# Altium PCB 电子脚铐手持式主控板V3.PcbDoc (part 2 of 3)
Units mm, origin at the board's own origin, x right, y up, seen from the top; angles counter-clockwise.
Board outline 100 x 95 mm, 2 copper layers (Top Layer, Bottom Layer); 124 components, 70 nets, 370 pads, 89 vias.
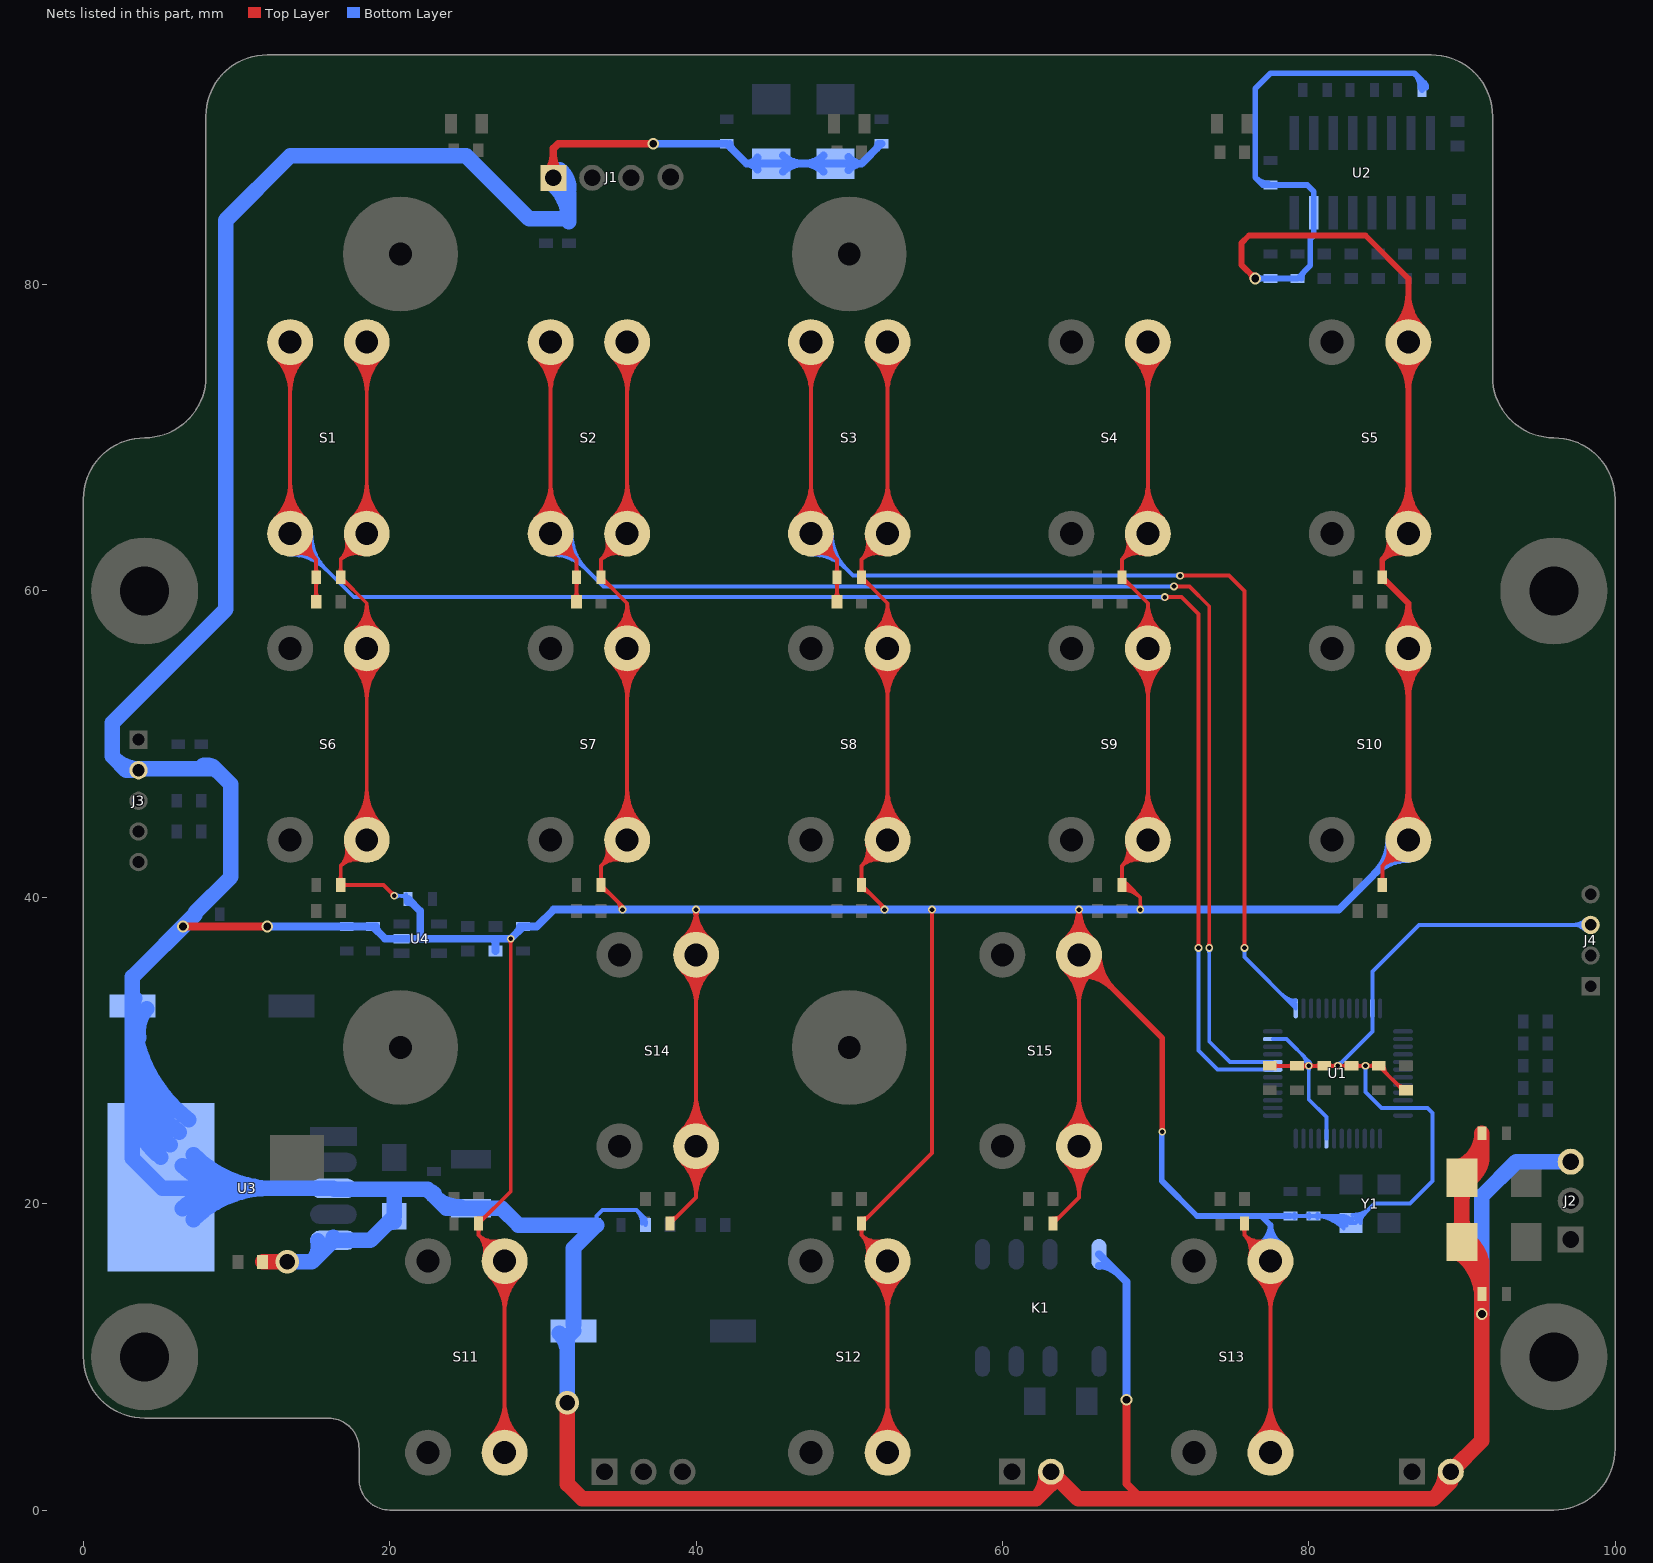
[diagram p2: the nets of this part, all layers, seen from the top]

## Via types
v1: diameter 0.508, hole 0.305, Top Layer to Bottom Layer, tented both sides, 75 vias
v2: diameter 0.762, hole 0.508, Top Layer to Bottom Layer, tented both sides, 9 vias
v3: diameter 1.524, hole 1.016, Top Layer to Bottom Layer, tented both sides, 5 vias

## Nets (pads, with @x,y where several pads share a name; then routed paths per layer and width w, separated by ;. In a path a pad name is that pad's centre, name@x,y a point inside that pad or via, vN(x,y) a via of type N, cw(c..) or ccw(c..) an arc to the next point about the centre after c; other vN are vias at no path point) (continued)
GND: C1.2 C2.2 C3.2 C4.2 C5.2 C6.2 C7.2 C8.1 C9.1 C10.2 C11.2 C12.2 C13.2 C14.2 C15.2 C16.2 C17.2 C18.2 C19.2 C20.2 C21.2 C23.1 C25.1 C26.1 C27.2 C28.2 C29.1 C30.2 C31.2 C32.2 C33.2 C34.2 C35.2 C36.2 C37.2 C38.2 C39.2 C40.2 C41.2 C42.2 C43.2 C44.2 C45.2 C46.2 D5.1 D6.1 D7.1 D8.2 D9.2 J1.1 J2.3 J3.2 J4.3 J6.2 J7.2 K1.8 R4.2 R10.2 R13.2 R15.1 S1.1 S2.1 S3.1 S4.1 S5.1 S6.1 S7.1 S8.1 S9.1 S10.1 S11.1 S12.1 S13.1 S14.1 S15.1 U1.8 U1.23 U1.35 U1.47 U2.15 U3.0 U3.3 U3.5 U4.2 Y1.2 | length 1603.9
  Top Layer w0.254: C35.2@16.678,41.072 ccw(c16.382,41.368) 16.8,41.368 ccw(c17.218,41.368) C35.2@16.922,41.072 ; C30.2@16.678,61.172 ccw(c16.382,61.468) 16.8,61.468 ccw(c17.218,61.468) C30.2@16.922,61.172 ; C30.2@16.8,60.577 cw(c16.8,59.797) 17.351,60.349 ; C35.2@16.922,40.678 cw(c17.218,40.382) 17.218,40.8 cw(c17.218,41.218) C35.2@16.922,40.922 ; S6.1@17.171,43.407 cw(c15.797,43.053) 16.8,42.05 ; S1.1@17.171,63.407 cw(c15.797,63.053) 16.8,62.05 ; S6.1@17.417,43.47 cw(c16.297,43.182) 17.115,42.364 cw(c17.932,41.547) S6.1@18.221,42.666 ; S1.1@17.417,63.47 cw(c16.297,63.182) 17.115,62.364 cw(c17.932,61.547) S1.1@18.221,62.666 ; S6.1@17.529,44.721 ccw(c15.185,47.065) 18.5,47.065 ccw(c21.815,47.065) S6.1@19.471,44.721 ; S6.1@17.529,55.279 cw(c15.185,52.935) 18.5,52.935 cw(c21.815,52.935) S6.1@19.471,55.279 ; S1.1@17.529,64.721 ccw(c15.185,67.065) 18.5,67.065 ccw(c21.815,67.065) S1.1@19.471,64.721 ; S1.1@17.529,75.279 cw(c15.185,72.935) 18.5,72.935 cw(c21.815,72.935) S1.1@19.471,75.279 ; S6.1@17.616,57.3 ccw(c16.018,59.2) 18.5,59.2 ; S6.1@17.663,43.534 cw(c16.797,43.311) 17.429,42.679 cw(c18.061,42.047) S6.1@18.284,42.912 ; S1.1@17.663,63.534 cw(c16.797,63.311) 17.429,62.679 cw(c18.061,62.047) S1.1@18.284,62.912 ; S6.1@17.709,44.541 ccw(c15.799,46.451) 18.5,46.451 ccw(c21.202,46.451) S6.1@19.291,44.541 ; S6.1@17.709,55.459 cw(c15.799,53.548) 18.5,53.548 cw(c21.202,53.548) S6.1@19.291,55.459 ; S1.1@17.709,64.541 ccw(c15.799,66.451) 18.5,66.451 ccw(c21.202,66.451) S1.1@19.291,64.541 ; S1.1@17.709,75.459 cw(c15.799,73.548) 18.5,73.548 cw(c21.202,73.548) S1.1@19.291,75.459 ; S6.1@17.78,57.106 ccw(c16.477,58.654) 18.5,58.654 ccw(c20.523,58.654) S6.1@19.221,57.106 ; S6.1@17.889,44.361 ccw(c16.412,45.838) 18.5,45.838 ccw(c20.588,45.838) S6.1@19.112,44.361 ; S6.1@17.889,55.638 cw(c16.412,54.162) 18.5,54.162 cw(c20.588,54.162) S6.1@19.112,55.638 ; S1.1@17.889,64.361 ccw(c16.412,65.838) 18.5,65.838 ccw(c20.588,65.838) S1.1@19.112,64.361 ; S1.1@17.889,75.638 cw(c16.412,74.162) 18.5,74.162 cw(c20.588,74.162) S1.1@19.112,75.638 ; S6.1@17.943,56.912 ccw(c16.936,58.108) 18.5,58.108 ccw(c20.064,58.108) S6.1@19.057,56.912 ; S6.1@18.157,42.42 ccw(c17.803,41.047) 16.8,42.05 ; S1.1@18.157,62.42 ccw(c17.803,61.047) 16.8,62.05 ; S1.1@18.5,76.25 S1.1@18.5,63.75 16.8,62.05 ; S6.1@19.384,57.3 cw(c20.983,59.2) 18.5,59.2 ; v1@20.173,40.1 ccw(c19.866,40.1) 20.083,40.317 ccw(c20.3,40.534) v1@20.3,40.227 ; v1(20.3,40.1) 19.6,40.8 C35.2@16.8,40.8 16.8,42.05 ; C40.2@25.678,18.428 cw(c25.382,18.132) 25.8,18.132 cw(c26.218,18.132) C40.2@25.922,18.428 ; C40.2@25.8,19.023 ccw(c25.8,19.803) 26.351,19.251 ; S11.1@26.171,16.593 ccw(c24.797,16.947) 25.8,17.95 ; S11.1@26.417,16.529 ccw(c25.297,16.818) 26.115,17.635 ccw(c26.932,18.453) S11.1@27.221,17.333 ; S11.1@26.529,4.721 ccw(c24.185,7.065) 27.5,7.065 ccw(c30.815,7.065) S11.1@28.471,4.721 ; S11.1@26.529,15.279 cw(c24.185,12.935) 27.5,12.935 cw(c30.815,12.935) S11.1@28.471,15.279 ; S11.1@26.663,16.466 ccw(c25.797,16.689) 26.429,17.321 ccw(c27.061,17.953) S11.1@27.284,17.087 ; S11.1@26.709,4.541 ccw(c24.799,6.451) 27.5,6.451 ccw(c30.202,6.451) S11.1@28.291,4.541 ; S11.1@26.709,15.459 cw(c24.799,13.548) 27.5,13.548 cw(c30.202,13.548) S11.1@28.291,15.459 ; S11.1@26.889,4.361 ccw(c25.412,5.838) 27.5,5.838 ccw(c29.589,5.838) S11.1@28.112,4.361 ; S11.1@26.889,15.638 cw(c25.412,14.161) 27.5,14.161 cw(c29.589,14.161) S11.1@28.112,15.638 ; S11.1@27.157,17.579 cw(c26.803,18.953) 25.8,17.95 ; S11.1@27.5,3.75 S11.1@27.5,16.25 25.8,17.95 ; v1@27.81,37.21 cw(c27.593,36.993) 27.9,36.993 cw(c28.207,36.993) v1@27.99,37.21 ; v1(27.9,37.3) 27.9,20.8 C40.2@25.8,18.7 25.8,17.95 ; C36.2@33.678,41.072 ccw(c33.382,41.368) 33.8,41.368 ccw(c34.218,41.368) C36.2@33.922,41.072 ; C31.2@33.678,61.172 ccw(c33.382,61.468) 33.8,61.468 ccw(c34.218,61.468) C31.2@33.922,61.172 ; C36.2@33.8,40.477 cw(c33.8,39.697) 34.351,40.249 ; C31.2@33.8,60.577 cw(c33.8,59.797) 34.351,60.349 ; S7.1@34.171,43.407 cw(c32.797,43.053) 33.8,42.05 ; S2.1@34.171,63.407 cw(c32.797,63.053) 33.8,62.05 ; S7.1@34.417,43.47 cw(c33.297,43.182) 34.115,42.364 cw(c34.932,41.547) S7.1@35.221,42.666 ; S2.1@34.417,63.47 cw(c33.297,63.182) 34.115,62.364 cw(c34.932,61.547) S2.1@35.221,62.666 ; S7.1@34.529,44.721 ccw(c32.185,47.065) 35.5,47.065 ccw(c38.815,47.065) S7.1@36.471,44.721 ; S7.1@34.529,55.279 cw(c32.185,52.935) 35.5,52.935 cw(c38.815,52.935) S7.1@36.471,55.279 ; S2.1@34.529,64.721 ccw(c32.185,67.065) 35.5,67.065 ccw(c38.815,67.065) S2.1@36.471,64.721 ; S2.1@34.529,75.279 cw(c32.185,72.935) 35.5,72.935 cw(c38.815,72.935) S2.1@36.471,75.279 ; S7.1@34.616,57.3 ccw(c33.018,59.2) 35.5,59.2 ; S7.1@34.663,43.534 cw(c33.797,43.311) 34.429,42.679 cw(c35.061,42.047) S7.1@35.284,42.912 ; S2.1@34.663,63.534 cw(c33.797,63.311) 34.429,62.679 cw(c35.061,62.047) S2.1@35.284,62.912 ; S7.1@34.709,44.541 ccw(c32.799,46.451) 35.5,46.451 ccw(c38.202,46.451) S7.1@36.291,44.541 ; S7.1@34.709,55.459 cw(c32.799,53.548) 35.5,53.548 cw(c38.202,53.548) S7.1@36.291,55.459 ; S2.1@34.709,64.541 ccw(c32.799,66.451) 35.5,66.451 ccw(c38.202,66.451) S2.1@36.291,64.541 ; S2.1@34.709,75.459 cw(c32.799,73.548) 35.5,73.548 cw(c38.202,73.548) S2.1@36.291,75.459 ; S7.1@34.78,57.106 ccw(c33.477,58.654) 35.5,58.654 ccw(c37.523,58.654) S7.1@36.221,57.106 ; 34.842,39.758 cw(c34.284,39.2) v1@35.073,39.2 ; S7.1@34.889,44.361 ccw(c33.412,45.838) 35.5,45.838 ccw(c37.589,45.838) S7.1@36.112,44.361 ; S7.1@34.889,55.638 cw(c33.412,54.162) 35.5,54.162 cw(c37.589,54.162) S7.1@36.112,55.638 ; S2.1@34.889,64.361 ccw(c33.412,65.838) 35.5,65.838 ccw(c37.589,65.838) S2.1@36.112,64.361 ; S2.1@34.889,75.638 cw(c33.412,74.162) 35.5,74.162 cw(c37.589,74.162) S2.1@36.112,75.638 ; S7.1@34.943,56.912 ccw(c33.936,58.108) 35.5,58.108 ccw(c37.064,58.108) S7.1@36.057,56.912 ; S7.1@35.157,42.42 ccw(c34.803,41.047) 33.8,42.05 ; S2.1@35.157,62.42 ccw(c34.803,61.047) 33.8,62.05 ; v1(35.2,39.2) 35.2,39.4 C36.2@33.8,40.8 33.8,42.05 ; S2.1@35.5,76.25 S2.1@35.5,63.75 33.8,62.05 ; S7.1@36.384,57.3 cw(c37.983,59.2) 35.5,59.2 ; C43.2@38.3,18.7 40,20.4 S14.1@40,23.75 S14.1@40,36.25 v1(40,39.2) ; C43.2@38.3,19.023 ccw(c38.3,19.803) 38.851,19.251 ; S14.1@39.029,22.779 cw(c36.686,20.435) 40,20.435 cw(c43.315,20.435) S14.1@40.971,22.779 ; S14.1@39.029,24.721 ccw(c36.686,27.065) 40,27.065 ccw(c43.315,27.065) S14.1@40.971,24.721 ; S14.1@39.029,35.279 cw(c36.686,32.935) 40,32.935 cw(c43.315,32.935) S14.1@40.971,35.279 ; S14.1@39.116,37.3 ccw(c37.518,39.2) v1(40,39.2) ; S14.1@39.209,22.959 cw(c37.299,21.048) 40,21.048 cw(c42.702,21.048) S14.1@40.791,22.959 ; S14.1@39.209,24.541 ccw(c37.299,26.451) 40,26.451 ccw(c42.702,26.451) S14.1@40.791,24.541 ; S14.1@39.209,35.459 cw(c37.299,33.548) 40,33.548 cw(c42.702,33.548) S14.1@40.791,35.459 ; S14.1@39.28,37.106 ccw(c37.977,38.654) 40,38.654 ccw(c42.023,38.654) S14.1@40.721,37.106 ; S14.1@39.389,23.138 cw(c37.912,21.662) 40,21.662 cw(c42.089,21.662) S14.1@40.612,23.138 ; S14.1@39.389,24.361 ccw(c37.912,25.838) 40,25.838 ccw(c42.089,25.838) S14.1@40.612,24.361 ; S14.1@39.389,35.638 cw(c37.912,34.162) 40,34.162 cw(c42.089,34.162) S14.1@40.612,35.638 ; S14.1@39.443,36.912 ccw(c38.436,38.108) 40,38.108 ccw(c41.564,38.108) S14.1@40.557,36.912 ; v1@39.894,39.13 cw(c39.636,38.962) 39.937,38.899 ; v1@39.91,39.11 cw(c39.693,38.893) 40,38.893 ; v1@39.93,39.094 cw(c39.762,38.837) 40.063,38.9 ; 39.938,38.9 cw(c40.237,38.838) v1@40.07,39.094 ; 40,38.894 cw(c40.306,38.894) v1@40.09,39.11 ; 40.063,38.9 cw(c40.362,38.963) v1@40.106,39.13 ; S14.1@40.884,37.3 cw(c42.483,39.2) v1(40,39.2) ; C41.2@50.678,18.428 cw(c50.382,18.132) 50.8,18.132 cw(c51.218,18.132) C41.2@50.922,18.428 ; C37.2@50.678,41.072 ccw(c50.382,41.368) 50.8,41.368 ccw(c51.218,41.368) C37.2@50.922,41.072 ; C32.2@50.678,61.172 ccw(c50.382,61.468) 50.8,61.468 ccw(c51.218,61.468) C32.2@50.922,61.172 ; C41.2@50.8,19.023 ccw(c50.8,19.803) 51.351,19.251 ; C37.2@50.8,40.477 cw(c50.8,39.697) 51.351,40.249 ; C32.2@50.8,60.577 cw(c50.8,59.797) 51.351,60.349 ; S12.1@51.171,16.593 ccw(c49.797,16.947) 50.8,17.95 ; S8.1@51.171,43.407 cw(c49.797,43.053) 50.8,42.05 ; S3.1@51.171,63.407 cw(c49.797,63.053) 50.8,62.05 ; S12.1@51.417,16.529 ccw(c50.297,16.818) 51.115,17.635 ccw(c51.932,18.453) S12.1@52.221,17.333 ; S8.1@51.417,43.47 cw(c50.297,43.182) 51.115,42.364 cw(c51.932,41.547) S8.1@52.221,42.666 ; S3.1@51.417,63.47 cw(c50.297,63.182) 51.115,62.364 cw(c51.932,61.547) S3.1@52.221,62.666 ; S12.1@51.529,4.721 ccw(c49.186,7.065) 52.5,7.065 ccw(c55.815,7.065) S12.1@53.471,4.721 ; S12.1@51.529,15.279 cw(c49.186,12.935) 52.5,12.935 cw(c55.815,12.935) S12.1@53.471,15.279 ; S8.1@51.529,44.721 ccw(c49.186,47.065) 52.5,47.065 ccw(c55.815,47.065) S8.1@53.471,44.721 ; S8.1@51.529,55.279 cw(c49.186,52.935) 52.5,52.935 cw(c55.815,52.935) S8.1@53.471,55.279 ; S3.1@51.529,64.721 ccw(c49.186,67.065) 52.5,67.065 ccw(c55.815,67.065) S3.1@53.471,64.721 ; S3.1@51.529,75.279 cw(c49.186,72.935) 52.5,72.935 cw(c55.815,72.935) S3.1@53.471,75.279 ; S8.1@51.616,57.3 ccw(c50.018,59.2) 52.5,59.2 ; S12.1@51.663,16.466 ccw(c50.797,16.689) 51.429,17.321 ccw(c52.061,17.953) S12.1@52.284,17.087 ; S8.1@51.663,43.534 cw(c50.797,43.311) 51.429,42.679 cw(c52.061,42.047) S8.1@52.284,42.912 ; S3.1@51.663,63.534 cw(c50.797,63.311) 51.429,62.679 cw(c52.061,62.047) S3.1@52.284,62.912 ; S12.1@51.709,4.541 ccw(c49.799,6.451) 52.5,6.451 ccw(c55.202,6.451) S12.1@53.291,4.541 ; S12.1@51.709,15.459 cw(c49.799,13.548) 52.5,13.548 cw(c55.202,13.548) S12.1@53.291,15.459 ; S8.1@51.709,44.541 ccw(c49.799,46.451) 52.5,46.451 ccw(c55.202,46.451) S8.1@53.291,44.541 ; S8.1@51.709,55.459 cw(c49.799,53.548) 52.5,53.548 cw(c55.202,53.548) S8.1@53.291,55.459 ; S3.1@51.709,64.541 ccw(c49.799,66.451) 52.5,66.451 ccw(c55.202,66.451) S3.1@53.291,64.541 ; S3.1@51.709,75.459 cw(c49.799,73.548) 52.5,73.548 cw(c55.202,73.548) S3.1@53.291,75.459 ; S8.1@51.78,57.106 ccw(c50.477,58.654) 52.5,58.654 ccw(c54.523,58.654) S8.1@53.221,57.106 ; S12.1@51.889,4.361 ccw(c50.412,5.838) 52.5,5.838 ccw(c54.589,5.838) S12.1@53.112,4.361 ; S12.1@51.889,15.638 cw(c50.412,14.161) 52.5,14.161 cw(c54.589,14.161) S12.1@53.112,15.638 ; S8.1@51.889,44.361 ccw(c50.412,45.838) 52.5,45.838 ccw(c54.589,45.838) S8.1@53.112,44.361 ; S8.1@51.889,55.638 cw(c50.412,54.162) 52.5,54.162 cw(c54.589,54.162) S8.1@53.112,55.638 ; S3.1@51.889,64.361 ccw(c50.412,65.838) 52.5,65.838 ccw(c54.589,65.838) S3.1@53.112,64.361 ; S3.1@51.889,75.638 cw(c50.412,74.162) 52.5,74.162 cw(c54.589,74.162) S3.1@53.112,75.638 ; S8.1@51.943,56.912 ccw(c50.936,58.108) 52.5,58.108 ccw(c54.064,58.108) S8.1@53.057,56.912 ; 52.012,39.588 cw(c51.625,39.2) v1@52.173,39.2 ; S12.1@52.157,17.579 cw(c51.803,18.953) 50.8,17.95 ; S8.1@52.157,42.42 ccw(c51.803,41.046) 50.8,42.05 ; S3.1@52.157,62.42 ccw(c51.803,61.046) 50.8,62.05 ; v1(52.3,39.2) 52.3,39.3 C37.2@50.8,40.8 50.8,42.05 ; S12.1@52.5,3.75 S12.1@52.5,16.25 50.8,17.95 ; S3.1@52.5,76.25 S3.1@52.5,63.75 50.8,62.05 ; S8.1@53.384,57.3 cw(c54.983,59.2) 52.5,59.2 ; v1@55.31,39.11 cw(c55.093,38.893) 55.4,38.893 cw(c55.707,38.893) v1@55.49,39.11 ; v1(55.4,39.2) 55.4,23.3 C41.2@50.8,18.7 50.8,17.95 ; C44.2@63.3,18.7 65,20.4 S15.1@65,23.75 S15.1@65,36.25 ; C44.2@63.3,19.023 ccw(c63.3,19.803) 63.851,19.251 ; S15.1@64.029,22.779 cw(c61.686,20.435) 65,20.435 cw(c68.315,20.435) S15.1@65.971,22.779 ; S15.1@64.029,24.721 ccw(c61.686,27.065) 65,27.065 ccw(c68.315,27.065) S15.1@65.971,24.721 ; S15.1@64.029,35.279 cw(c61.686,32.935) 65,32.935 cw(c68.315,32.935) S15.1@65.971,35.279 ; S15.1@64.209,22.959 cw(c62.299,21.048) 65,21.048 cw(c67.702,21.048) S15.1@65.791,22.959 ; S15.1@64.209,24.541 ccw(c62.299,26.451) 65,26.451 ccw(c67.702,26.451) S15.1@65.791,24.541 ; S15.1@64.209,35.459 cw(c62.299,33.548) 65,33.548 cw(c67.702,33.548) S15.1@65.791,35.459 ; S15.1@64.389,23.138 cw(c62.912,21.662) 65,21.662 cw(c67.089,21.662) S15.1@65.612,23.138 ; S15.1@64.389,24.361 ccw(c62.912,25.838) 65,25.838 ccw(c67.089,25.838) S15.1@65.612,24.361 ; S15.1@64.389,35.638 cw(c62.912,34.162) 65,34.162 cw(c67.089,34.162) S15.1@65.612,35.638 ; C38.2@67.678,41.072 ccw(c67.382,41.368) 67.8,41.368 ccw(c68.218,41.368) C38.2@67.922,41.072 ; C33.2@67.678,61.172 ccw(c67.382,61.468) 67.8,61.468 ccw(c68.218,61.468) C33.2@67.922,61.172 ; C38.2@67.791,40.985 cw(c67.805,40.477) 68.164,40.836 ; C38.2@67.798,40.731 cw(c67.826,39.662) 68.582,40.418 ; C33.2@67.8,60.577 cw(c67.8,59.797) 68.351,60.349 ; C38.2@67.805,40.477 cw(c67.847,38.847) 69,40 ; C38.2@67.926,40.682 cw(c68.2,40.424) 68.2,40.8 ; C38.2@67.926,40.918 ccw(c68.2,41.176) 68.2,40.8 ; S9.1@68.171,43.407 cw(c66.797,43.053) 67.8,42.05 ; S4.1@68.171,63.407 cw(c66.797,63.053) 67.8,62.05 ; S9.1@68.417,43.47 cw(c67.297,43.182) 68.115,42.364 cw(c68.932,41.547) S9.1@69.221,42.666 ; S4.1@68.417,63.47 cw(c67.297,63.182) 68.115,62.364 cw(c68.932,61.547) S4.1@69.221,62.666 ; S9.1@68.529,44.721 ccw(c66.186,47.065) 69.5,47.065 ccw(c72.815,47.065) S9.1@70.471,44.721 ; S9.1@68.529,55.279 cw(c66.186,52.935) 69.5,52.935 cw(c72.815,52.935) S9.1@70.471,55.279 ; S4.1@68.529,64.721 ccw(c66.186,67.065) 69.5,67.065 ccw(c72.815,67.065) S4.1@70.471,64.721 ; S4.1@68.529,75.279 cw(c66.186,72.935) 69.5,72.935 cw(c72.815,72.935) S4.1@70.471,75.279 ; S9.1@68.616,57.3 ccw(c67.018,59.2) 69.5,59.2 ; S9.1@68.663,43.534 cw(c67.797,43.311) 68.429,42.679 cw(c69.061,42.047) S9.1@69.284,42.912 ; S4.1@68.663,63.534 cw(c67.797,63.311) 68.429,62.679 cw(c69.061,62.047) S4.1@69.284,62.912 ; S9.1@68.709,44.541 ccw(c66.799,46.451) 69.5,46.451 ccw(c72.202,46.451) S9.1@70.291,44.541 ; S9.1@68.709,55.459 cw(c66.799,53.548) 69.5,53.548 cw(c72.202,53.548) S9.1@70.291,55.459 ; S4.1@68.709,64.541 ccw(c66.799,66.451) 69.5,66.451 ccw(c72.202,66.451) S4.1@70.291,64.541 ; S4.1@68.709,75.459 cw(c66.799,73.548) 69.5,73.548 cw(c72.202,73.548) S4.1@70.291,75.459 ; S9.1@68.78,57.106 ccw(c67.477,58.654) 69.5,58.654 ccw(c71.523,58.654) S9.1@70.221,57.106 ; S9.1@68.889,44.361 ccw(c67.412,45.838) 69.5,45.838 ccw(c71.589,45.838) S9.1@70.112,44.361 ; S9.1@68.889,55.638 cw(c67.412,54.162) 69.5,54.162 cw(c71.589,54.162) S9.1@70.112,55.638 ; S4.1@68.889,64.361 ccw(c67.412,65.838) 69.5,65.838 ccw(c71.589,65.838) S4.1@70.112,64.361 ; S4.1@68.889,75.638 cw(c67.412,74.162) 69.5,74.162 cw(c71.589,74.162) S4.1@70.112,75.638 ; v1@68.91,39.29 ccw(c68.693,39.507) 69,39.507 ccw(c69.307,39.507) v1@69.09,39.29 ; S9.1@68.943,56.912 ccw(c67.936,58.108) 69.5,58.108 ccw(c71.064,58.108) S9.1@70.057,56.912 ; v1(69,39.2) 69,40 ; S9.1@69.157,42.42 ccw(c68.803,41.046) 67.8,42.05 ; S4.1@69.157,62.42 ccw(c68.803,61.046) 67.8,62.05 ; S4.1@69.5,76.25 S4.1@69.5,63.75 67.8,62.05 ; S9.1@70.384,57.3 cw(c71.982,59.2) 69.5,59.2 ; C42.2@75.678,18.428 cw(c75.382,18.132) 75.8,18.132 cw(c76.218,18.132) C42.2@75.922,18.428 ; C42.2@75.8,18.7 75.8,17.95 ; S13.1@76.171,16.593 ccw(c74.797,16.947) 75.8,17.95 ; S13.1@76.417,16.529 ccw(c75.297,16.818) 76.115,17.635 ccw(c76.932,18.453) S13.1@77.221,17.333 ; S13.1@76.529,4.721 ccw(c74.186,7.065) 77.5,7.065 ccw(c80.815,7.065) S13.1@78.471,4.721 ; S13.1@76.529,15.279 cw(c74.186,12.935) 77.5,12.935 cw(c80.815,12.935) S13.1@78.471,15.279 ; S13.1@76.663,16.466 ccw(c75.797,16.689) 76.429,17.321 ccw(c77.061,17.953) S13.1@77.284,17.087 ; S13.1@76.709,4.541 ccw(c74.799,6.451) 77.5,6.451 ccw(c80.202,6.451) S13.1@78.291,4.541 ; S13.1@76.709,15.459 cw(c74.799,13.548) 77.5,13.548 cw(c80.202,13.548) S13.1@78.291,15.459 ; S13.1@76.889,4.361 ccw(c75.412,5.838) 77.5,5.838 ccw(c79.589,5.838) S13.1@78.112,4.361 ; S13.1@76.889,15.638 cw(c75.412,14.161) 77.5,14.161 cw(c79.589,14.161) S13.1@78.112,15.638 ; S13.1@77.157,17.579 cw(c76.803,18.953) 75.8,17.95 ; C6.2@77.45,29 C5.2@79.23,29 v1(80,29) C4.2@81.01,29 v1(81.9,29) C46.2@82.79,29 v1(83.7,29) C7.2@84.57,29 86.27,27.3 R4.2@86.3,27.3 ; S13.1@77.5,3.75 S13.1@77.5,16.25 75.8,17.95 ; C6.2@77.722,28.878 cw(c78.018,28.582) 78.018,29 cw(c78.018,29.418) C6.2@77.722,29.122 ; C5.2@78.958,28.878 ccw(c78.662,28.582) 78.662,29 ccw(c78.662,29.418) C5.2@78.958,29.122 ; C5.2@79.502,28.878 cw(c79.798,28.582) 79.798,29 cw(c79.798,29.418) C5.2@79.502,29.122 ; C5.2@79.676,28.968 cw(c79.741,28.726) v1@79.913,28.908 ; C5.2@79.676,29.032 ccw(c79.741,29.274) v1@79.913,29.092 ; v1@79.91,28.91 ccw(c79.693,28.693) 79.693,29 ccw(c79.693,29.307) v1@79.91,29.09 ; v1@80.09,28.91 cw(c80.307,28.693) 80.307,29 cw(c80.307,29.307) v1@80.09,29.09 ; C4.2@80.738,28.878 ccw(c80.442,28.582) 80.442,29 ccw(c80.442,29.418) C4.2@80.738,29.122 ; C4.2@81.282,28.878 cw(c81.578,28.582) 81.578,29 cw(c81.578,29.418) C4.2@81.282,29.122 ; v1@81.81,28.91 ccw(c81.593,28.693) 81.593,29 ccw(c81.593,29.307) v1@81.81,29.09 ; v1@81.99,28.91 cw(c82.207,28.693) 82.207,29 cw(c82.207,29.307) v1@81.99,29.09 ; C46.2@82.518,28.878 ccw(c82.222,28.582) 82.222,29 ccw(c82.222,29.418) C46.2@82.518,29.122 ; C46.2@83.062,28.878 cw(c83.358,28.582) 83.358,29 cw(c83.358,29.418) C46.2@83.062,29.122 ; v1@83.61,28.91 ccw(c83.393,28.693) 83.393,29 ccw(c83.393,29.307) v1@83.61,29.09 ; v1@83.79,28.91 cw(c84.007,28.693) 84.007,29 cw(c84.007,29.307) v1@83.79,29.09 ; C7.2@84.298,28.878 ccw(c84.002,28.582) 84.002,29 ccw(c84.002,29.418) C7.2@84.298,29.122 ; C39.2@84.678,41.072 ccw(c84.382,41.368) 84.8,41.368 ccw(c85.218,41.368) C39.2@84.922,41.072 ; C39.2@84.8,40.8 84.8,42.05 ; C7.2@84.893,29 ccw(c85.673,29) 85.121,28.449 ; S10.1@85.171,43.407 cw(c83.797,43.053) 84.8,42.05 ; S10.1@85.417,43.47 cw(c84.297,43.182) 85.115,42.364 cw(c85.932,41.547) S10.1@86.221,42.666 ; S10.1@85.663,43.534 cw(c84.797,43.311) 85.429,42.679 cw(c86.061,42.047) S10.1@86.284,42.912 ; 85.733,27.837 ccw(c86.25,28.354) R4.2@86.25,27.623 ; R4.2@85.926,27.644 cw(c85.682,27.4) R4.2@86.027,27.4 ; S10.1@86.157,42.42 ccw(c85.803,41.046) 84.8,42.05 ; S10.1@86.5,43.75 84.8,42.05 ; 16.8,42.05 S6.1@18.5,43.75 S6.1@18.5,56.25 18.5,59.2 ; 16.8,62.05 C30.2@16.8,60.9 18.5,59.2 ; 33.8,42.05 S7.1@35.5,43.75 S7.1@35.5,56.25 35.5,59.2 ; 33.8,62.05 C31.2@33.8,60.9 35.5,59.2 ; 50.8,42.05 S8.1@52.5,43.75 S8.1@52.5,56.25 52.5,59.2 ; 50.8,62.05 C32.2@50.8,60.9 52.5,59.2 ; 67.8,42.05 C38.2@67.8,40.8 68.2,40.8 ; 67.8,42.05 S9.1@69.5,43.75 S9.1@69.5,56.25 69.5,59.2 ; 67.8,62.05 C33.2@67.8,60.9 69.5,59.2 ; 68.2,40.8 69,40
  Top Layer w0.381: S15.1@64.122,37.221 ccw(c62.331,39.2) v1(65,39.2) ; S15.1@64.377,36.938 ccw(c63.108,38.341) 65,38.341 ccw(c66.892,38.342) S15.1@65.623,36.938 ; S15.1@65,34.94 cw(c65,31.779) 67.236,34.014 cw(c69.471,36.25) S15.1@66.31,36.25 ; S15.1@65,35.321 cw(c65,33.08) 66.585,34.665 cw(c68.17,36.25) S15.1@65.929,36.25 ; S15.1@65.879,37.221 cw(c67.668,39.2) v1(65,39.2) ; v1(70.433,24.7) 70.433,30.817 S15.1@65,36.25 v1(65,39.2) ; v2@76.309,80.4 ccw(c75.85,80.4) 76.175,80.725 ccw(c76.5,81.05) v2@76.5,80.59 ; v2(76.5,80.4) 75.6,81.3 75.6,82.7 76.1,83.2 83.7,83.2 86.5,80.4 S5.1@86.5,76.25 S5.1@86.5,63.75 84.8,62.05 ; C34.2@84.8,60.641 cw(c84.8,60.014) 85.243,60.457 ; S5.1@85.22,63.474 cw(c83.702,63.148) 84.8,62.05 ; 85.295,62.544 ccw(c84.516,63.323) S5.1@85.593,63.554 ; 85.295,62.544 cw(c86.073,61.766) S5.1@86.305,62.842 ; S10.1@85.574,44.676 ccw(c83.339,46.911) 86.5,46.911 ccw(c89.662,46.911) S10.1@87.426,44.676 ; S10.1@85.574,55.324 cw(c83.339,53.088) 86.5,53.088 cw(c89.662,53.088) S10.1@87.426,55.324 ; S5.1@85.574,64.676 ccw(c83.339,66.911) 86.5,66.911 ccw(c89.662,66.911) S5.1@87.426,64.676 ; S5.1@85.574,75.324 cw(c83.339,73.088) 86.5,73.088 cw(c89.662,73.088) S5.1@87.426,75.324 ; S5.1@85.574,77.176 ccw(c83.339,79.411) 86.5,79.411 ccw(c89.662,79.411) S5.1@87.426,77.176 ; S10.1@85.622,57.221 ccw(c83.833,59.2) 86.5,59.2 ; S10.1@85.844,44.406 ccw(c84.259,45.991) 86.5,45.991 ccw(c88.742,45.991) S10.1@87.157,44.406 ; S10.1@85.844,55.593 cw(c84.259,54.008) 86.5,54.008 cw(c88.742,54.008) S10.1@87.157,55.593 ; S5.1@85.844,64.406 ccw(c84.259,65.991) 86.5,65.991 ccw(c88.742,65.991) S5.1@87.157,64.406 ; S5.1@85.844,75.593 cw(c84.259,74.008) 86.5,74.008 cw(c88.742,74.008) S5.1@87.157,75.593 ; S5.1@85.844,76.906 ccw(c84.259,78.491) 86.5,78.491 ccw(c88.742,78.491) S5.1@87.157,76.906 ; S10.1@85.877,56.938 ccw(c84.609,58.341) 86.5,58.341 ccw(c88.392,58.341) S10.1@87.123,56.938 ; S5.1@86.225,62.47 ccw(c85.898,60.952) 84.8,62.05 ; S10.1@86.5,43.75 S10.1@86.5,56.25 86.5,59.2 ; S10.1@87.379,57.221 cw(c89.168,59.2) 86.5,59.2 ; 84.8,62.05 C34.2@84.8,60.9 86.5,59.2
  Top Layer w0.508: v2(6.5,38.1) v2(12,38.1) ; J1.1@30.256,87.396 ccw(c29.239,88.414) 30.677,88.414 ccw(c32.116,88.414) J1.1@31.099,87.396 ; J1.1@30.677,86.975 30.677,88.877 31,89.2 v2(37.2,89.2) ; v2(68.1,7.2) 68.1,1.724 69.1,0.724
  Top Layer w1.016: R10.2@11.7,16.2 v3(13.3,16.2) ; v3(31.6,7) 31.6,1.7 32.576,0.724 62.2,0.724 ; J6.2@62.829,2.47 cw(c60.658,2.266) 62.2,0.724 ; 88.24,0.84 ccw(c86.578,2.502) J7.2@88.928,2.502 ; D8.2@89.652,18.098 ccw(c88.812,18.938) 90,18.938 ccw(c91.188,18.938) D8.2@90.348,18.098 ; D7.1@89.652,21.102 cw(c88.812,20.262) 90,20.262 cw(c91.188,20.262) D7.1@90.348,21.102 ; D8.2@89.721,16.845 cw(c87.656,13.842) C28.2@91.3,13.842 ; D7.1@89.817,22.407 ccw(c88.937,24.6) C26.1@91.3,24.6 91.3,23 D7.1@90,21.7 D8.2@90,17.5 91.3,16.2 C28.2@91.3,14.1 v2(91.3,12.8) 91.3,4.532 J7.2@89.27,2.502 89.27,1.87 88.124,0.724 69.1,0.724 64.948,0.724 J6.2@63.17,2.502 63.17,1.694 62.2,0.724 ; D8.2@90,16.758 cw(c90,14.967) 91.267,16.233 ; D7.1@90,22.442 ccw(c90,24.233) 91.267,22.967 ; D7.1@90.195,21.464 ccw(c89.54,23.098) 91.3,23.098 ; D8.2@90.297,17.682 cw(c88.985,15.774) 91.3,15.774
  Bottom Layer w0.254: v1(20.3,40.1) 21,40.1 C18.2@21.2,39.9 ; v1@20.39,40.01 cw(c20.607,39.793) 20.607,40.1 cw(c20.607,40.407) v1@20.39,40.19 ; 20.662,40.1 cw(c20.662,39.512) C18.2@21.078,39.928 ; C18.2@20.903,40.1 ccw(c20.903,40.347) C18.2@21.078,40.172 ; C19.2@33.378,18.872 ccw(c33.082,19.168) 33.5,19.168 ccw(c33.918,19.168) C19.2@33.622,18.872 ; C19.2@33.5,18.6 33.5,19.2 33.9,19.6 36.1,19.6 36.7,19 R15.1@36.7,18.6 ; 36.107,19.593 cw(c35.214,18.7) R15.1@36.477,18.7 ; 36.541,19.159 cw(c36.082,18.7) R15.1@36.731,18.7 ; U1.23@77.65,30.75 78.55,30.75 80,29.3 ; C8.1@78.8,19.2 C9.1@80.3,19.2 82.3,19.2 Y1.2@82.75,18.75 83.05,18.75 84.3,20 86.6,20 88.074,21.474 88.074,25.927 87.751,26.25 U1.47@86.15,26.25 84.75,26.25 83.7,27.3 v1(83.7,29) ; C8.1@79.072,19.078 cw(c79.368,18.782) 79.368,19.2 cw(c79.368,19.618) C8.1@79.072,19.322 ; 79.571,29.729 cw(c78.842,29) v1@79.873,29 ; v1@79.91,28.91 cw(c79.693,28.693) 80,28.693 cw(c80.307,28.693) v1@80.09,28.91 ; v1@79.912,29.091 ccw(c79.709,29.3) 80,29.3 ; 80.005,29.295 cw(c79.709,29) v1@80.127,29 ; C9.1@80.028,19.078 ccw(c79.732,18.782) 79.732,19.2 ccw(c79.732,19.618) C9.1@80.028,19.322 ; v1@80.088,29.091 cw(c80.291,29.3) 80,29.3 ; C9.1@80.301,19.2 cw(c80.301,16.401) Y1.2@82.28,18.38 ; C9.1@80.572,19.078 cw(c80.868,18.782) 80.868,19.2 cw(c80.868,19.618) C9.1@80.572,19.322 ; 80.914,19.2 cw(c80.914,17.014) Y1.2@82.46,18.56 ; U1.8@81.15,24.25 81.15,25.65 80,26.8 v1(80,29) 80,29.3 ; 81.527,19.2 cw(c81.527,17.627) Y1.2@82.639,18.739 ; v1(81.9,29) 84.15,31.25 U1.35@84.15,32.75 84.15,35.15 87.2,38.2 J4.3@98.4,38.2 ; v1@81.9,29.127 ccw(c81.9,29.434) 82.117,29.217 ccw(c82.334,29) v1@82.027,29 ; Y1.2@82.141,19.2 cw(c82.141,18.241) Y1.2@82.819,18.919 ; Y1.2@82.85,19.019 ccw(c82.85,20.151) 83.651,19.351 ; Y1.2@82.85,19.273 ccw(c82.85,21.018) 84.084,19.784 ; Y1.2@83.373,18.75 cw(c84.153,18.75) 83.601,19.301 ; v1@83.61,28.91 cw(c83.393,28.693) 83.7,28.693 cw(c84.007,28.693) v1@83.79,28.91 ; J4.3@98.066,37.866 ccw(c97.258,37.058) 97.258,38.2 ccw(c97.258,39.342) J4.3@98.066,38.534
  Bottom Layer w0.381: v1(70.433,24.7) 70.4,24.667 70.4,21.5 72.7,19.2 76.9,19.2 ; v2(76.5,80.4) C20.2@77.5,80.4 C21.2@79.257,80.4 80.1,81.243 80.1,83 80.325,83.225 U2.15@80.325,84.7 80.325,86.075 79.9,86.5 C23.1@77.5,86.5 77,86.5 76.5,87 76.5,92.8 77.5,93.8 86.9,93.8 ; 76.566,86.934 ccw(c77.35,87.719) C23.1@77.35,86.609 ; v2@76.635,80.265 cw(c76.96,79.94) 76.96,80.4 cw(c76.96,80.86) v2@76.635,80.535 ; S13.1@76.811,17.363 ccw(c76.047,18.6) 77.5,18.6 ; S13.1@77.012,17.039 ccw(c76.47,17.916) 77.5,17.916 ccw(c78.531,17.916) S13.1@77.989,17.039 ; S13.1@77.5,16.25 77.5,18.6 ; S13.1@78.189,17.363 cw(c78.954,18.6) 77.5,18.6 ; C8.1@78.8,19.2 76.9,19.2 ; C21.2@79.517,80.4 cw(c80.143,80.4) 79.7,80.843 ; C29.1@87.291,92.851 ccw(c85.957,92.857) 86.9,93.8 ; C29.1@87.4,92.7 87.4,93.3 86.9,93.8 ; 87.546,93.154 cw(c87.242,92.851) C29.1@87.671,92.849 ; 76.9,19.2 77.5,18.6
  Bottom Layer w0.508: v2(12,38.1) C15.2@17.2,38.1 C16.2@18.9,38.1 19.7,37.3 U4.2@20.775,37.3 22,37.3 ; C16.2@19.096,38.1 ccw(c19.569,38.1) 19.235,37.765 ; C18.2@21.2,39.704 cw(c21.2,39.231) 21.535,39.565 ; C18.2@21.2,39.9 22,39.1 22,37.3 ; R13.2@26.9,36.5 26.9,37.1 26.7,37.3 ; 28.365,37.765 ccw(c28.031,38.1) C17.2@28.504,38.1 ; v2(37.2,89.2) C27.2@42,89.2 43.3,87.9 ; C27.2@42.196,89.2 ccw(c42.669,89.2) 42.335,88.865 ; D9.2@44.018,87.503 ccw(c43.3,87.052) 43.3,87.9 ; D9.2@44.018,88.297 cw(c43.3,88.748) 43.3,87.9 ; D9.2@45.678,87.372 cw(c46.951,86.099) 46.951,87.9 cw(c46.951,89.701) D9.2@45.678,88.428 ; D6.1@48.322,87.372 ccw(c47.049,86.099) 47.049,87.9 ccw(c47.049,89.701) D6.1@48.322,88.428 ; D6.1@49.957,87.466 cw(c50.8,86.864) 50.8,87.9 ; D6.1@49.957,88.334 ccw(c50.8,88.936) 50.8,87.9 ; 51.765,88.865 ccw(c51.431,89.2) C25.1@51.904,89.2 ; C25.1@52.1,89.2 50.8,87.9 ; K1.8@66.3,15.954 cw(c66.3,14.153) 67.574,15.426 ; K1.8@66.3,16.7 68.1,14.9 v2(68.1,7.2) ; S10.1@85.254,43.75 cw(c82.246,43.75) 84.373,41.623 cw(c86.5,39.496) S10.1@86.5,42.504 ; S10.1@85.762,43.75 cw(c83.981,43.75) 85.24,42.49 cw(c86.5,41.23) S10.1@86.5,43.012 ; S10.1@86.5,43.75 81.95,39.2 v1(69,39.2) v1(65,39.2) v1(55.4,39.2) v1(52.3,39.2) v1(40,39.2) v1(35.2,39.2) 30.7,39.2 29.6,38.1 C17.2@28.7,38.1 v1(27.9,37.3) 26.7,37.3 ; 22,37.3 26.7,37.3 ; 43.3,87.9 D9.2@44.9,87.9 D6.1@49.1,87.9 50.8,87.9
  Bottom Layer w1.016: 2.077,49.023 ccw(c3.6,50.545) J3.2@3.6,48.392 ; 3.2,26.754 ccw(c7.865,26.754) U3.0@5.042,23.04 ; 3.2,28.802 ccw(c9.422,28.802) U3.0@5.656,23.849 ; 3.2,30.851 ccw(c10.98,30.851) U3.0@6.271,24.658 ; C13.2@3.2,32.9 ccw(c12.537,32.9) U3.0@6.886,25.466 ; C13.2@3.215,32.828 cw(c3.876,32.966) C13.2@3.369,33.411 ; J3.2@3.6,48.3 2.8,48.3 1.9,49.2 1.9,51.4 9.3,58.8 9.3,84.2 13.5,88.4 25,88.4 29.1,84.3 C1.2@30.2,84.3 C2.2@31.7,84.3 31.7,85.952 J1.1@30.677,86.975 ; 3.628,30.837 cw(c5.785,31.285) C13.2@4.132,32.74 ; J3.2@3.7,48.4 C3.2@6.2,48.4 C45.2@7.7,48.4 8.6,48.4 ; U3.0@6.473,19.687 cw(c9.642,16.519) 9.642,21 ; U3.0@6.473,22.482 ccw(c10.05,26.06) 10.05,21 ; U3.0@7.191,18.969 cw(c12.094,14.066) 12.094,21 ; U3.0@7.191,23.2 ccw(c12.503,28.512) 12.503,21 ; C45.2@7.787,48.598 cw(c8.03,47.831) 8.6,48.4 ; C45.2@7.85,48.608 cw(c7.85,47.299) 8.775,48.225 ; v3(13.3,16.2) 14.911,16.2 ; U3.5@15.312,17.585 cw(c13.856,17.256) 14.911,16.2 ; U3.5@16.214,17.503 ccw(c15.98,17.737) U3.5@16.303,17.81 ; D5.1@19.673,18.548 cw(c20.3,17.922) D5.1@20.3,18.808 ; 22.21,20.932 cw(c22.21,19.96) C12.2@22.897,20.647 ; C12.2@22.907,20.493 ccw(c24.6,22.187) C11.2@24.6,19.792 ; J1.1@30.462,86.709 cw(c28.355,84.111) C2.2@31.7,84.111 ; J1.1@30.658,86.634 cw(c30.594,85.529) 31.7,85.529 ; C10.2@31.079,11.529 cw(c29.821,10.271) 31.6,10.271 ; J1.1@31.102,87.498 cw(c30.084,86.244) 31.7,86.244 ; v3(31.6,7) 31.6,11.3 C10.2@32,11.7 ; C10.2@32,12.1 32,17.1 C19.2@33.5,18.6 28.4,18.6 27.3,19.7 C11.2@25.3,19.7 23.7,19.7 C12.2@22.9,20.5 22.468,20.932 20.4,20.932 ; v2(91.3,12.8) 91.3,20.5 93.54,22.74 J2.3@97.1,22.74 ; 8.6,48.4 9.632,47.368 9.632,41.332 7.3,39 C14.2@7.3,38.9 3.2,34.8 C13.2@3.2,32.9 3.2,22.96 U3.0@5.075,21.085 5.16,21 U3.3@16.324,21 16.393,20.932 20.4,20.932 ; 14.911,16.2 U3.5@16.324,17.613 18.738,17.613 D5.1@20.3,19.175 20.3,20.832 20.4,20.932
KEY0: C30.1 R20.1 S1.2 U1.19 | length 162.5
  Top Layer w0.254: S1.2@12.529,64.721 ccw(c10.185,67.065) 13.5,67.065 ccw(c16.815,67.065) S1.2@14.471,64.721 ; S1.2@12.529,75.279 cw(c10.185,72.935) 13.5,72.935 cw(c16.815,72.935) S1.2@14.471,75.279 ; S1.2@12.709,64.541 ccw(c10.799,66.451) 13.5,66.451 ccw(c16.202,66.451) S1.2@14.291,64.541 ; S1.2@12.709,75.459 cw(c10.799,73.548) 13.5,73.548 cw(c16.202,73.548) S1.2@14.291,75.459 ; S1.2@12.889,64.361 ccw(c11.412,65.838) 13.5,65.838 ccw(c15.588,65.838) S1.2@14.112,64.361 ; S1.2@12.889,75.638 cw(c11.412,74.162) 13.5,74.162 cw(c15.588,74.162) S1.2@14.112,75.638 ; S1.2@13.5,76.25 S1.2@13.5,63.75 15.2,62.05 ; S1.2@13.716,62.912 cw(c13.939,62.047) 14.571,62.679 cw(c15.203,63.311) S1.2@14.338,63.534 ; S1.2@13.78,62.666 cw(c14.068,61.547) 14.885,62.364 cw(c15.703,63.182) S1.2@14.584,63.47 ; S1.2@13.843,62.42 cw(c14.197,61.047) 15.2,62.05 ; S1.2@14.83,63.407 ccw(c16.203,63.053) 15.2,62.05 ; R20.1@15.042,59.558 ccw(c14.662,59.938) 15.2,59.938 ccw(c15.738,59.938) R20.1@15.358,59.558 ; C30.1@15.078,60.628 cw(c14.782,60.332) 15.2,60.332 cw(c15.618,60.332) C30.1@15.322,60.628 ; C30.1@15.078,61.172 ccw(c14.782,61.468) 15.2,61.468 ccw(c15.618,61.468) C30.1@15.322,61.172 ; R20.1@15.2,59.3 C30.1@15.2,60.9 15.2,62.05 ; v1(70.6,59.6) 71.7,59.6 72.8,58.5 v1(72.8,36.7) ; v1@70.69,59.51 cw(c70.907,59.293) 70.907,59.6 cw(c70.907,59.907) v1@70.69,59.69 ; v1@72.71,36.79 ccw(c72.493,37.007) 72.8,37.007 ccw(c73.107,37.007) v1@72.89,36.79
  Bottom Layer w0.254: S1.2@13.5,62.377 cw(c13.5,59.062) 15.844,61.406 cw(c18.188,63.75) S1.2@14.873,63.75 ; S1.2@13.5,62.631 cw(c13.5,59.929) 15.41,61.84 cw(c17.321,63.75) S1.2@14.619,63.75 ; S1.2@13.5,62.885 cw(c13.5,60.797) 14.977,62.273 cw(c16.453,63.75) S1.2@14.365,63.75 ; S1.2@13.5,63.75 17.65,59.6 v1(70.6,59.6) ; v1@70.51,59.51 ccw(c70.293,59.293) 70.293,59.6 ccw(c70.293,59.907) v1@70.51,59.69 ; v1@72.71,36.61 cw(c72.493,36.393) 72.8,36.393 cw(c73.107,36.393) v1@72.89,36.61 ; v1(72.8,36.7) 72.8,30 74.05,28.75 U1.19@77.65,28.75
KEY1: C31.1 R21.1 S2.2 U1.20 | length 145.2
  Top Layer w0.254: S2.2@29.529,64.721 ccw(c27.185,67.065) 30.5,67.065 ccw(c33.815,67.065) S2.2@31.471,64.721 ; S2.2@29.529,75.279 cw(c27.185,72.935) 30.5,72.935 cw(c33.815,72.935) S2.2@31.471,75.279 ; S2.2@29.709,64.541 ccw(c27.799,66.451) 30.5,66.451 ccw(c33.202,66.451) S2.2@31.291,64.541 ; S2.2@29.709,75.459 cw(c27.799,73.548) 30.5,73.548 cw(c33.202,73.548) S2.2@31.291,75.459 ; S2.2@29.889,64.361 ccw(c28.412,65.838) 30.5,65.838 ccw(c32.588,65.838) S2.2@31.112,64.361 ; S2.2@29.889,75.638 cw(c28.412,74.162) 30.5,74.162 cw(c32.588,74.162) S2.2@31.112,75.638 ; S2.2@30.5,76.25 S2.2@30.5,63.75 32.2,62.05 ; S2.2@30.716,62.912 cw(c30.939,62.047) 31.571,62.679 cw(c32.203,63.311) S2.2@31.338,63.534 ; S2.2@30.78,62.666 cw(c31.068,61.547) 31.885,62.365 cw(c32.703,63.182) S2.2@31.584,63.47 ; S2.2@30.843,62.42 cw(c31.197,61.048) 32.2,62.05 ; S2.2@31.83,63.407 ccw(c33.202,63.053) 32.2,62.05 ; R21.1@32.042,59.558 ccw(c31.662,59.938) 32.2,59.938 ccw(c32.738,59.938) R21.1@32.358,59.558 ; C31.1@32.078,60.628 cw(c31.782,60.332) 32.2,60.332 cw(c32.618,60.332) C31.1@32.322,60.628 ; C31.1@32.078,61.172 ccw(c31.782,61.468) 32.2,61.468 ccw(c32.618,61.468) C31.1@32.322,61.172 ; R21.1@32.2,59.3 C31.1@32.2,60.9 32.2,62.05 ; v1(71.2,60.3) 72.2,60.3 73.5,59 v1(73.5,36.7) ; v1@71.29,60.21 cw(c71.507,59.993) 71.507,60.3 cw(c71.507,60.607) v1@71.29,60.39 ; v1@73.41,36.79 ccw(c73.193,37.007) 73.5,37.007 ccw(c73.807,37.007) v1@73.59,36.79
  Bottom Layer w0.254: S2.2@30.5,62.377 cw(c30.5,59.062) 32.844,61.406 cw(c35.188,63.75) S2.2@31.873,63.75 ; S2.2@30.5,62.631 cw(c30.5,59.929) 32.41,61.84 cw(c34.321,63.75) S2.2@31.619,63.75 ; S2.2@30.5,62.885 cw(c30.5,60.797) 31.977,62.273 cw(c33.453,63.75) S2.2@31.365,63.75 ; S2.2@30.5,63.75 33.95,60.3 v1(71.2,60.3) ; v1@71.11,60.21 ccw(c70.893,59.993) 70.893,60.3 ccw(c70.893,60.607) v1@71.11,60.39 ; v1@73.41,36.61 cw(c73.193,36.393) 73.5,36.393 cw(c73.807,36.393) v1@73.59,36.61 ; v1(73.5,36.7) 73.5,30.6 74.85,29.25 U1.20@77.65,29.25
KEY2: C32.1 R22.1 S3.2 U1.25 | length 127.4
  Top Layer w0.254: S3.2@46.529,64.721 ccw(c44.185,67.065) 47.5,67.065 ccw(c50.815,67.065) S3.2@48.471,64.721 ; S3.2@46.529,75.279 cw(c44.185,72.935) 47.5,72.935 cw(c50.815,72.935) S3.2@48.471,75.279 ; S3.2@46.709,64.541 ccw(c44.799,66.451) 47.5,66.451 ccw(c50.202,66.451) S3.2@48.291,64.541 ; S3.2@46.709,75.459 cw(c44.799,73.548) 47.5,73.548 cw(c50.202,73.548) S3.2@48.291,75.459 ; S3.2@46.889,64.361 ccw(c45.412,65.838) 47.5,65.838 ccw(c49.588,65.838) S3.2@48.112,64.361 ; S3.2@46.889,75.638 cw(c45.412,74.162) 47.5,74.162 cw(c49.588,74.162) S3.2@48.112,75.638 ; S3.2@47.5,76.25 S3.2@47.5,63.75 49.2,62.05 ; S3.2@47.716,62.912 cw(c47.939,62.047) 48.571,62.679 cw(c49.203,63.311) S3.2@48.338,63.534 ; S3.2@47.78,62.666 cw(c48.068,61.547) 48.885,62.365 cw(c49.703,63.182) S3.2@48.584,63.47 ; S3.2@47.843,62.42 cw(c48.197,61.048) 49.2,62.05 ; S3.2@48.83,63.407 ccw(c50.202,63.053) 49.2,62.05 ; R22.1@49.042,59.558 ccw(c48.662,59.938) 49.2,59.938 ccw(c49.738,59.938) R22.1@49.358,59.558 ; C32.1@49.078,60.628 cw(c48.782,60.332) 49.2,60.332 cw(c49.618,60.332) C32.1@49.322,60.628 ; C32.1@49.078,61.172 ccw(c48.782,61.468) 49.2,61.468 ccw(c49.618,61.468) C32.1@49.322,61.172 ; R22.1@49.2,59.3 C32.1@49.2,60.9 49.2,62.05 ; v1(71.6,61) 74.8,61 75.8,60 v1(75.8,36.7) ; v1@71.69,60.91 cw(c71.907,60.693) 71.907,61 cw(c71.907,61.307) v1@71.69,61.09 ; v1@75.71,36.79 ccw(c75.493,37.007) 75.8,37.007 ccw(c76.107,37.007) v1@75.89,36.79
  Bottom Layer w0.254: S3.2@47.5,62.377 cw(c47.5,59.062) 49.844,61.406 cw(c52.188,63.75) S3.2@48.873,63.75 ; S3.2@47.5,62.631 cw(c47.5,59.929) 49.41,61.84 cw(c51.321,63.75) S3.2@48.619,63.75 ; S3.2@47.5,62.885 cw(c47.5,60.797) 48.977,62.273 cw(c50.453,63.75) S3.2@48.365,63.75 ; S3.2@47.5,63.75 50.25,61 v1(71.6,61) ; v1@71.51,60.91 ccw(c71.293,60.693) 71.293,61 ccw(c71.293,61.307) v1@71.51,61.09 ; v1@75.71,36.61 cw(c75.493,36.393) 75.8,36.393 cw(c76.107,36.393) v1@75.89,36.61 ; v1(75.8,36.7) 75.8,36.1 U1.25@79.15,32.75 U1.25@79.15,33.05 ; 78.257,33.643 ccw(c79.15,34.536) U1.25@79.15,33.273 ; 78.691,33.209 ccw(c79.15,33.668) U1.25@79.15,33.019 ; U1.25@79.124,32.776 ccw(c79.15,32.801) U1.25@79.15,32.765